# Altium PCB PCB_BaseBoard.PcbDoc
Units mil, origin at the board's own origin, x right, y up, seen from the top; angles counter-clockwise.
Board outline 2677.17 x 3346.46 mil, 3 copper layers (Top Layer, Mid-Layer 2, Bottom Layer); 48 components, 108 nets, 218 pads, 22 vias.
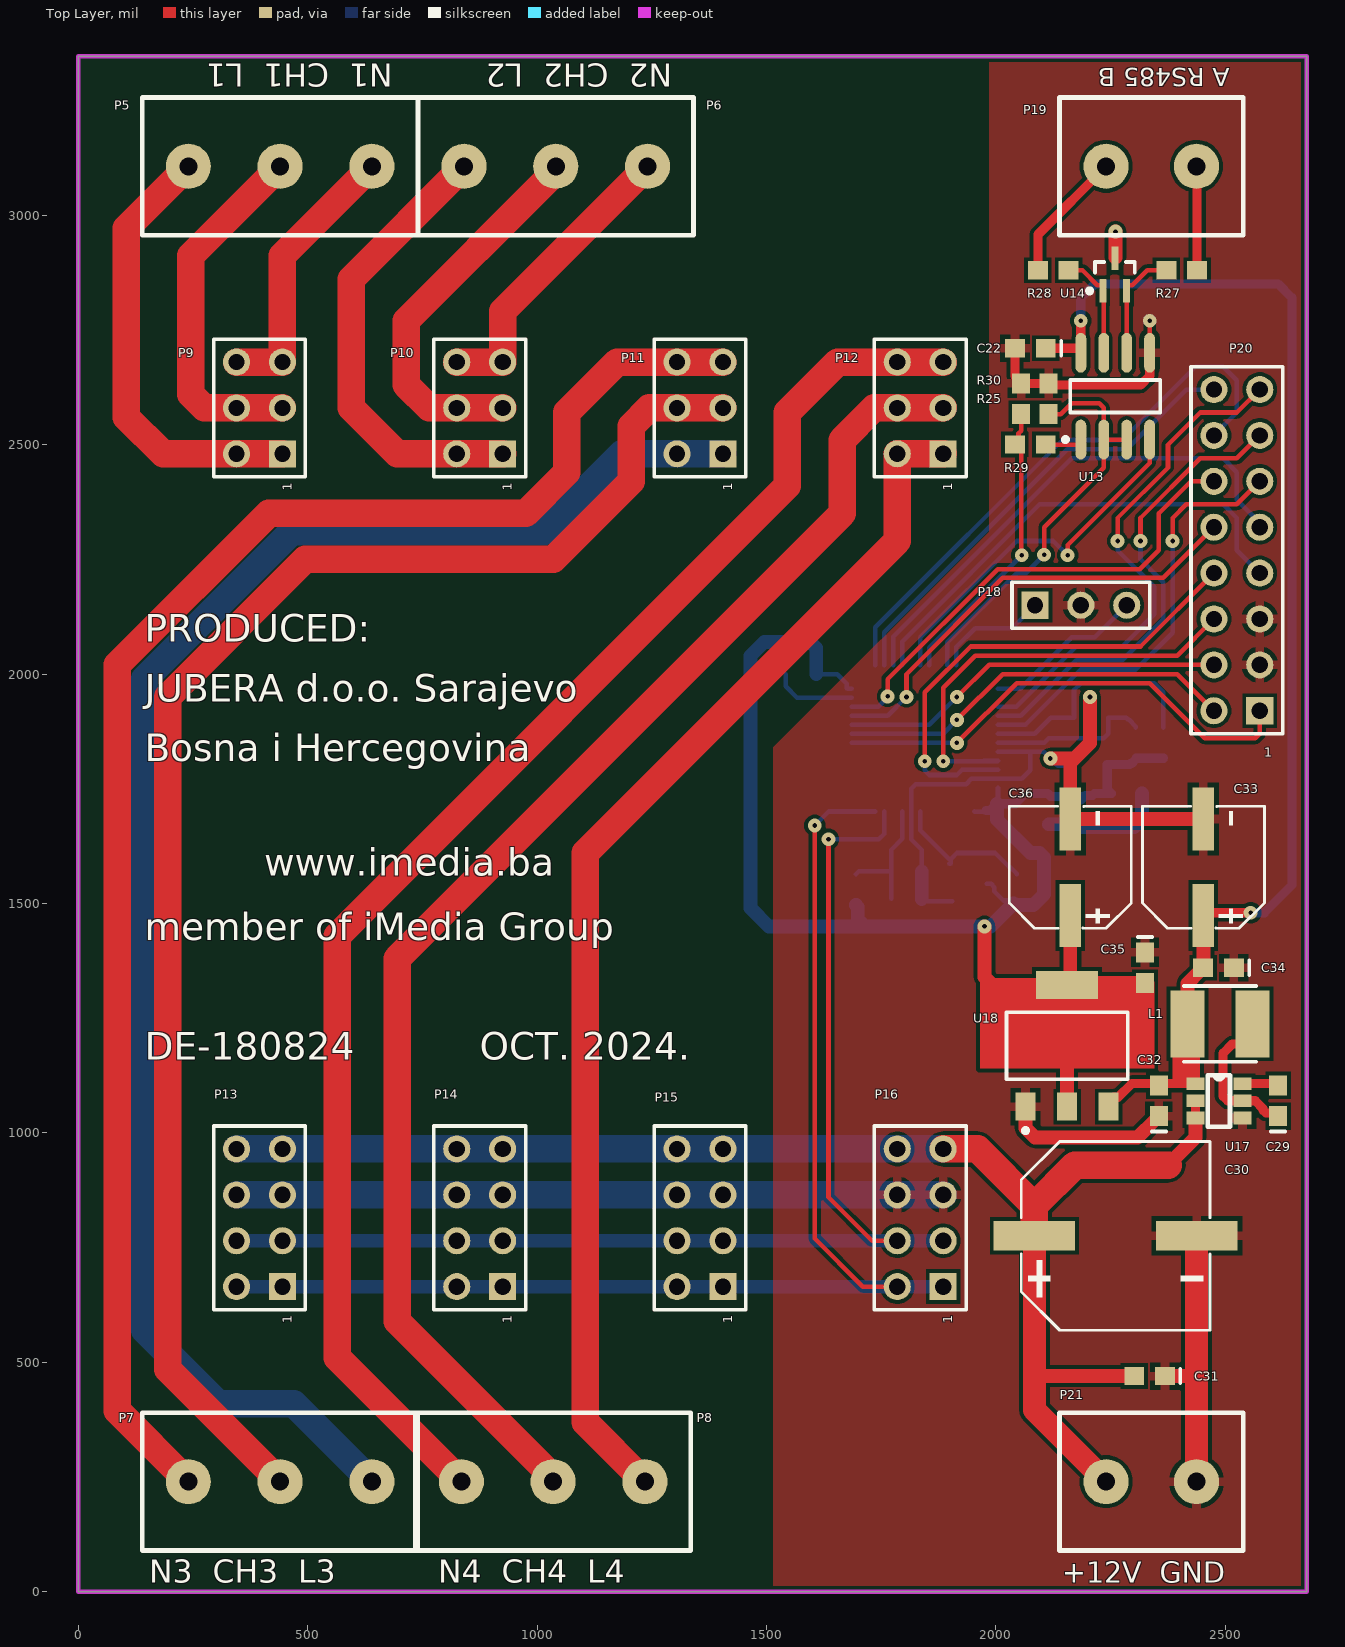
[diagram p0: Top Layer view]
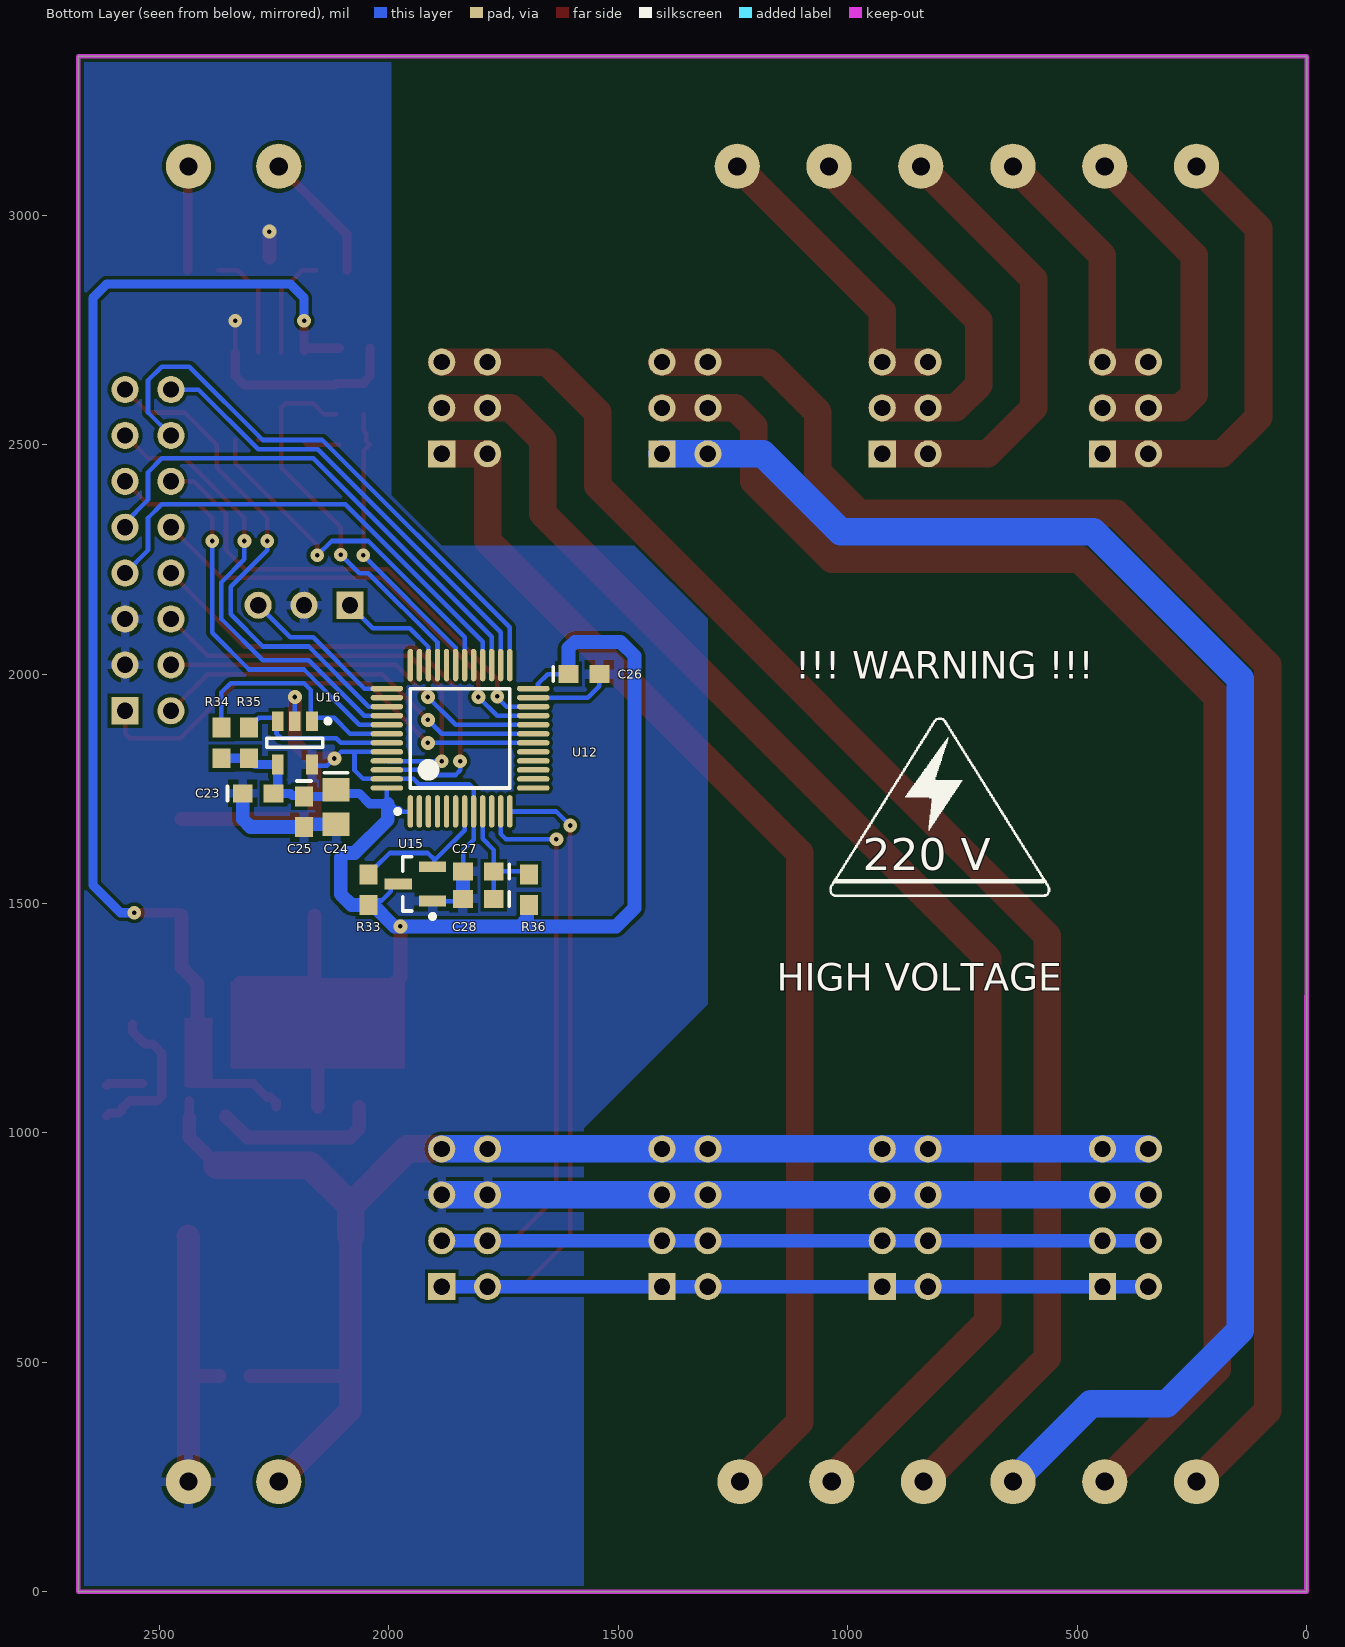
[diagram p1: Bottom Layer view, seen from below]
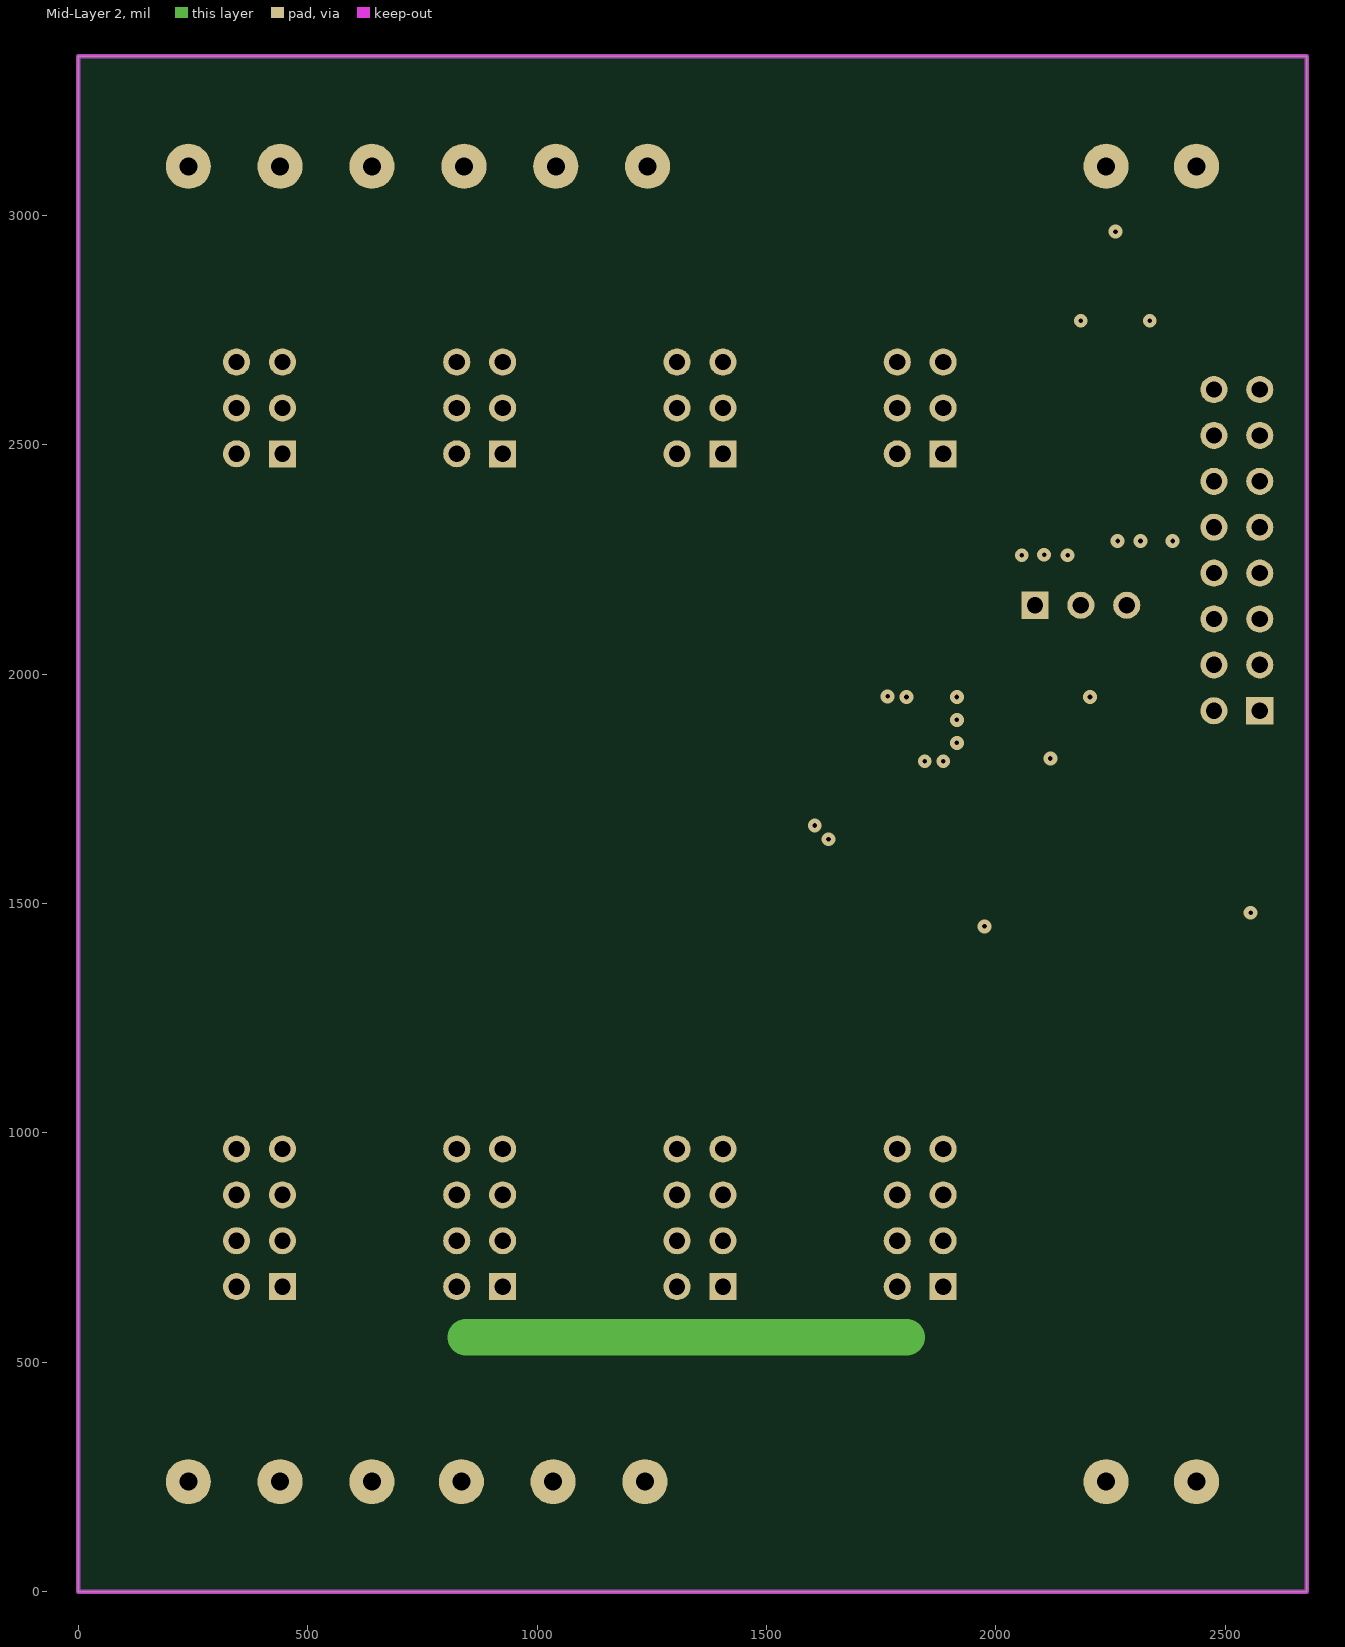
[diagram p2: Mid-Layer 2]

## Layer stack, top to bottom
Top Solder: solder mask 0.4, Solder Resist, Dk 3.5
Top Layer: signal copper 1.4
Dielectric 1: dielectric 12.6, FR-4, Dk 4.8
Mid-Layer 2: signal copper 1.4
Dielectric2: dielectric 12.6, FR-4, Dk 4.8
Bottom Layer: signal copper 1.4
Bottom Solder: solder mask 0.4, Solder Resist, Dk 3.5

## Board outline
0,0 0,3346.46 2677.17,3346.46 2677.17,0

## Design rules (kind name [scope] priority, off if disabled: settings)
BoardOutlineClearance [All] p1: gap=11.81 ignorepadtopadclearanceinfootprint=FALSE except(15.75: Arc-SplitBarrior Arc-SplitContinuation Track-SplitBarrior Track-SplitContinuation SMDPad-SplitBarrior SMDPad-SplitContinuation THPad-SplitBarrior THPad-SplitContinuation Via-SplitBarrior Via-SplitContinuation Fill-SplitBarrior Fill-SplitContinuation Poly-SplitBarrior Poly-SplitContinuation Region-SplitBarrior Region-SplitContinuation Text-SplitBarrior Text-SplitContinuation)
Clearance "Clearance Different Nets" [All] p1: gap=7.87 ignorepadtopadclearanceinfootprint=FALSE except(3.5: Arc-Arc Arc-Track Arc-SMDPad Track-Track Track-SMDPad; 5: SMDPad-SMDPad SMDPad-Via THPad-Via Via-Via; 10: Arc-Via Arc-Text Track-Via Track-Text SMDPad-Text THPad-Text Via-Text Fill-Text Poly-Text Region-Text Text-Text; 19.68: THPad-THPad Via-Hole)
Clearance "Clearance Same Nets" [All] p2: gap=7.87 ignorepadtopadclearanceinfootprint=FALSE except(3.5: Arc-Arc Arc-Track Arc-SMDPad Track-Track Track-SMDPad SMDPad-SMDPad; 5: SMDPad-Via THPad-Via; 10: Arc-Via Arc-Text Track-Via Track-Text SMDPad-Text THPad-Text Via-Via Via-Text Fill-Text Poly-Text Region-Text Text-Text)
Clearance "Clearance Bottom Layer" [OnLayer('Bottom Layer')] p3: gap=8 ignorepadtopadclearanceinfootprint=TRUE except(10: Arc-Text Track-Text SMDPad-Text THPad-Text Via-Text Fill-Text Poly-Text Region-Text Text-Text)
Clearance "Clearance Top Layer" [OnLayer('Top Layer')] p4: gap=8 ignorepadtopadclearanceinfootprint=TRUE except(10: Arc-Text Track-Text SMDPad-Text THPad-Text Via-Text Fill-Text Poly-Text Region-Text Text-Text)
HoleSize [All] p1: absolutevalues=TRUE maxlimit=248.03 minlimit=7.87 maxpercent=80.000 minpercent=20.000
MinimumAnnularRing [All] p1: minimumring=5.12
MinimumSolderMaskSliver [All] p1: minsoldermaskwidth=3.94
PolygonConnect PolygonConnect_1 [All] p1: thpad.connectstyle=Relief thpad.reliefconductorwidth=20 thpad.reliefentries=4 thpad.polygonreliefangle="90 Angle" thpad.airgapwidth=10 smdpad.connectstyle=Relief smdpad.reliefconductorwidth=20 smdpad.reliefentries=4 smdpad.polygonreliefangle="90 Angle" smdpad.airgapwidth=10 via.connectstyle=Direct via.reliefconductorwidth=20 via.reliefentries=4 via.polygonreliefangle="90 Angle" via.airgapwidth=10
RoutingCorners [All] p1: cornerstyle=Round minsetback=100 maxsetback=100
RoutingVias [All] p1: holewidth=19.68 width=39.37 viastyle="Through Hole" minholewidth=7.87 minwidth=13.78 maxholewidth=39.37 maxwidth=78.74
SilkToSilkClearance [All] p1: silktosilkclearance=3.94
SilkToSolderMaskClearance [IsPad] p1: minsilkscreentomaskgap=3.94 clearancetoexposedcopper=TRUE
SolderMaskExpansion [All] p1: expansion=4 istentingtop=FALSE
SupplyNets "Schematic Supply Nets_10" [InNet('GND1')] p1: voltage=0.000
SupplyNets "Schematic Supply Nets_9" [InNet('3V3')] p2: voltage=0.000
SupplyNets "Schematic Supply Nets_8" [InNet('L1')] p3: voltage=0.000
SupplyNets "Schematic Supply Nets_7" [InNet('+12_1')] p4: voltage=0.000
SupplyNets "Schematic Supply Nets_6" [InNet('GND')] p5: voltage=0.000
SupplyNets "Schematic Supply Nets_5" [InNet('L1IN')] p6: voltage=0.000
SupplyNets "Schematic Supply Nets_4" [InNet('GND2')] p7: voltage=0.000
SupplyNets "Schematic Supply Nets_3" [InNet('5V')] p8: voltage=0.000
SupplyNets "Schematic Supply Nets_2" [InNet('+3V3_1')] p9: voltage=0.000
SupplyNets "Schematic Supply Nets_1" [InNet('+12V')] p10: voltage=0.000
SupplyNets "Schematic Supply Nets" [InNet('12V')] p11: voltage=0.000
Width [All] p1: maxlimit=100 minlimit=3.5 preferedwidth=15
25 further rules are at their usual default settings.

## Components (designator, comment, footprint, x,y, rotation, side; value= is the part's Value field where it differs from the comment)
C22 "100nF" 0603 2075,2710 r180 top
C23 "" 0603 2285,1740 r180 bottom value=100nF
C24 "4u7" 0805 2115,1710 r270 bottom
C25 "100nF" 0603 2185,1700 r270 bottom
C26 "100nF" 0603 1575,2000 r180 bottom
C27 "1uF" 0603 1805,1570 r0 bottom
C28 "10nF" 0603 1805,1510 r0 bottom
C29 "" 0603 2615,1070 r90 top value=100nF
C30 "470uF" "ROQANG VT1V471M1010" 2275,770 r0 top value=10uF
C31 "" 0603 2335,470 r180 top value=100nF
C32 "" 0603 2355,1070 r90 top value=100nF
C33 "470uF" "SMD,D6.3xL7.7mm Aluminum Electrolytic Capacitors" 2455,1590 r90 top
C34 "" 0603 2485,1360 r180 top value=100nF
C35 "" 0603 2325,1360 r270 top value=100nF
C36 "" "SMD,D6.3xL7.7mm Aluminum Electrolytic Capacitors" 2165,1590 r90 top value=220uF
L1 "" XRNR4030-4.7uH/M 2485,1240 r0 top value=4,7uH
P5 "DIMMER1" "TERMINAL BLOK 3" 440,3106.5 r90 top locked
P6 "DIMMER2" "TERMINAL BLOK 3" 1040.86,3106.5 r90 top locked
P7 "DIMMER3" "TERMINAL BLOK 3" 440,240 r270 top locked
P8 "DIMMER4" "TERMINAL BLOK 3" 1035,240 r270 top locked
P9 "Header 3X2" HDR2X3 445,2480 r90 top locked
P10 "Header 3X2" HDR2X3 925,2480 r90 top locked
P11 "Header 3X2" HDR2X3 1405,2480 r90 top locked
P12 "Header 3X2" HDR2X3 1885,2480 r90 top locked
P13 "Header 4X2" HDR2X4 445,665 r90 top locked
P14 "Header 4X2" HDR2X4 925,665 r90 top locked
P15 "Header 4X2" HDR2X4 1405,665 r90 top locked
P16 "Header 4X2" HDR2X4 1885,665 r90 top locked
P18 "ULINK ICSP" HDR1X3 2085,2150 r0 top
P19 "RS485" "TERMINAL BLOK 2" 2338.5,3106.5 r270 top
P20 "Header 8X2" HDR2X8 2575,1920 r90 top
P21 "POWER" "TERMINAL BLOK 2" 2338.5,240 r90 top locked
R25 "10K" ERA-0603 2115,2600 r270 top
R27 "10R" ERA-0603 2405,2880 r180 top
R28 "10R" ERA-0603 2125,2880 r0 top
R29 "1K2" ERA-0603 2075,2500 r0 top
R30 "2K2" ERA-0603 2055,2600 r90 top
R33 "10K" ERA-0603 2045,1530 r270 bottom
R34 "2K2" ERA-0603 2365,1850 r270 bottom
R35 "2K2" ERA-0603 2305,1850 r270 bottom
R36 "10R" ERA-0603 1695,1530 r270 bottom
U12 "STM32F030C8T6" STM-LQFP48_N 1845,1860 r90 bottom
U13 "SN75176BD" D008_N 2260,2605.51 r90 top
U14 "ESDS552" DCK3_N 2259.18,2870.53 r90 top
U15 "TLV803MDBZR" DBZ3_N 1942.4,1542.6 r0 bottom
U16 "24AA01T-I/OT" SOT-23-OT5_N 2205,1850 r270 bottom
U17 "AP63205" TSOT-26 2435,1107.4 r0 top
U18 "REG1117-3.3" ZZ311 2155,1190 r0 top

## Footprints (in the part's own frame and the unit in brackets; to place one, negate y for a bottom-side part, rotate by r counter-clockwise, add the part's x,y. Pads: shape width x height; smd on the part's side, far side on the other; paste and mask are expansions set on the pad)
0603 [mm] "Chip Capacitor; Body 1.6 x 0.8 mm (LxW typ)"
  rect 1.1x1 smd: 1(-0.85,0) 2(0.85,0)
  silkscreen extent -1.7,-0.4 -1.7,0.4
0805 [mm] "Chip Capacitor; Body 2.0 x 1.2 mm (LxW typ)"
  rect 1.3x1.5 smd: 1(-0.95,0) 2(0.95,0)
  silkscreen extent -1.9,-0.65 -1.9,0.65
D008_N [mm] "SOIC, 8-Leads, Body 4.9x3.9mm, Pitch 1.27mm, IPC Medium Density"
  oval 2.2x0.6 smd: 1(-2.4,1.905) 2(-2.4,0.635) 3(-2.4,-0.635) 4(-2.4,-1.905) 5(2.4,-1.905) 6(2.4,-0.635) 7(2.4,0.635) 8(2.4,1.905)
  silkscreen extent -2.52,-2.5 0.9,2.88, body extent -1.95,-2.45 1.95,2.45, height 1.75
DBZ3_N [mm] "SOT23, 3-Leads, Body 2.9x1.3mm, Pitch 0.95mm, Lead Span 2.4mm, IPC Medium Density"
  rect 1.5x0.6 smd: 1(-0.95,0.95) 2(-0.95,-0.95) 3(0.95,0)
  silkscreen extent -1.07,-1.5 0.7,1.92, body extent -0.7,-1.52 0.7,1.52, height 1.12
DCK3_N [mm] "SOT23, 3-Leads, Body 2.0x1.25mm, Pitch 0.65mm, Lead Span 2.1mm, IPC Medium Density"
  rect 1.3x0.4 smd: 1(-0.9,0.65) 2(-0.9,-0.65) 3(0.9,0)
  silkscreen extent -1.02,-1.1 0.7,1.52, body extent -0.7,-1.07 0.7,1.08, height 1.1
ERA-0603 [mm] "Chip Resistor; Body 1.6 x 0.8 mm (LxW typ)"
  rect 1.1x1 smd: 1(-0.85,0) 2(0.85,0)
HDR1X3 [mm] "Connector; Header; 3 Position"
  rect 1.5x1.5 hole 0.9: 1(0,0)
  round 1.5 hole 0.9: 2(2.54,0) 3(5.08,0)
  silkscreen extent -1.27,-1.27 6.35,1.27
HDR2X3 [mm] "Connector; Header; 3x2 Position"
  rect 1.5x1.5 hole 0.9: 1(0,0)
  round 1.5 hole 0.9: 2(0,2.54) 3(2.54,0) 4(2.54,2.54) 5(5.08,0) 6(5.08,2.54)
  silkscreen extent -1.27,-1.27 6.35,3.81
HDR2X4 [mm] "Connector; Header; 4x2 Position"
  rect 1.5x1.5 hole 0.9: 1(0,0)
  round 1.5 hole 0.9: 2(0,2.54) 3(2.54,0) 4(2.54,2.54) 5(5.08,0) 6(5.08,2.54) 7(7.62,0) 8(7.62,2.54)
  silkscreen extent -1.27,-1.27 8.89,3.81
HDR2X8 [mm] "Connector; Header; 8x2 Position"
  rect 1.5x1.5 hole 0.9: 1(0,0)
  round 1.5 hole 0.9: 2(0,2.54) 3(2.54,0) 4(2.54,2.54) 5(5.08,0) 6(5.08,2.54) 7(7.62,0) 8(7.62,2.54) 9(10.16,0) 10(10.16,2.54) 11(12.7,0) 12(12.7,2.54) 13(15.24,0) 14(15.24,2.54) 15(17.78,0) 16(17.78,2.54)
  silkscreen extent -1.27,-1.27 19.05,3.81
"ROQANG VT1V471M1010" [mm] "470uF 35V 286mA@120Hz ±20% SMD,D10xL10.2mm Aluminum Electrolytic Capacitors - SMD ROHS"
  rect 4.5x1.65 smd: 1(-4.862,0.146) 2(4.138,0.146)
  silkscreen extent -5.59,-5.08 4.86,5.37, body extent -5,-5 5,5, height 10.2
"SMD,D6.3xL7.7mm Aluminum Electrolytic Capacitors" [mm]
  rect 3.5x1.2 smd paste+0 mask+0.051: 1(-2.949,0.074) 2(2.391,0.074)
  silkscreen extent -3.66,-3.3 3.1,3.45, body extent -3.4,-3.15 2.9,3.15, height 7.7
SOT-23-OT5_N [mm] "SOT23, 5-Leads, Body 2.9x1.6mm, Pitch 0.95mm, Lead Span 2.7mm, IPC Medium Density"
  rect 1.1x0.65 smd: 1(-1.2,0.95) 2(-1.2,0) 3(-1.2,-0.95) 4(1.2,-0.95) 5(1.2,0.95)
  silkscreen extent -1.32,-1.55 0.25,1.95, body extent -0.9,-1.55 0.9,1.55, height 1.45
STM-LQFP48_N [mm] "QFP, 48-Leads, Body 7x7mm, Pitch 0.5mm, IPC Medium Density"
  oval 1.8x0.3 smd: 1(-4.05,2.75) 2(-4.05,2.25) 3(-4.05,1.75) 4(-4.05,1.25) 5(-4.05,0.75) 6(-4.05,0.25) 7(-4.05,-0.25) 8(-4.05,-0.75) 9(-4.05,-1.25) 10(-4.05,-1.75) 11(-4.05,-2.25) 12(-4.05,-2.75) 25(4.05,-2.75) 26(4.05,-2.25) 27(4.05,-1.75) 28(4.05,-1.25) 29(4.05,-0.75) 30(4.05,-0.25) 31(4.05,0.25) 32(4.05,0.75) 33(4.05,1.25) 34(4.05,1.75) 35(4.05,2.25) 36(4.05,2.75)
  oval 0.3x1.8 smd: 13(-2.75,-4.05) 14(-2.25,-4.05) 15(-1.75,-4.05) 16(-1.25,-4.05) 17(-0.75,-4.05) 18(-0.25,-4.05) 19(0.25,-4.05) 20(0.75,-4.05) 21(1.25,-4.05) 22(1.75,-4.05) 23(2.25,-4.05) 24(2.75,-4.05) 37(2.75,4.05) 38(2.25,4.05) 39(1.75,4.05) 40(1.25,4.05) 41(0.75,4.05) 42(0.25,4.05) 43(-0.25,4.05) 44(-0.75,4.05) 45(-1.25,4.05) 46(-1.75,4.05) 47(-2.25,4.05) 48(-2.75,4.05)
  silkscreen extent -4.17,-2.75 2.75,3.58, body extent -3.5,-3.5 3.5,3.5, height 1.6
"TERMINAL BLOK 2" [mm] "Terminal blok 3,5mm"
  round 2.5 hole 1: 1(0,-2.5) 2(0,2.5)
  silkscreen extent -3.81,-5.08 3.81,5.08
"TERMINAL BLOK 3" [mm] "Terminal blok konektor 3 pina"
  round 2.5 hole 1: 1(0,5.08) 2(0,0) 3(0,-5.08)
  silkscreen extent -3.81,-7.62 3.81,7.62
TSOT-26 [mm]
  rect 1x0.7 smd: 1(0,0) 2(0,-0.95) 3(0,-1.9) 4(2.6,-1.9) 5(2.6,-0.95) 6(2.6,0)
  silkscreen extent 0.69,-2.38 1.91,0.48, body extent 0.53,-2.51 2.03,0.61, height 1
XRNR4030-4.7uH/M [mm] "2A 4.7uH Magnetic Adhesive Inductor ±20% 2.9A SMD-2P,4x4mm Power Inductors ROHS"
  rect 1.9x3.7 smd paste+0 mask+0.051: 1(-1.717,-0.059) 2(1.883,-0.059)
  silkscreen extent -1.92,-2.16 2.08,2.04
ZZ311 [mm] "SOT-223/SC-73; 4 Leads; Body 6.7 x 7.3 mm, inc. leads (LxW max)"
  rect 1.1x1.55 smd: 1(-2.3,-3.375) 2(0,-3.375) 3(2.3,-3.375)
  rect 3.45x1.55 smd: 4(0,3.375)
  silkscreen extent -3.35,-4.82 3.35,1.85

## Part data
C22 C23 C25 C26 C27 C28 C31 C35: library part C0603, "Ceramic Chip Capacitor - Standard", PackageDocument=Mar-2001, Code_IPC="1608 [0603]", Code_JEITA=0603, ComponentLink1Description="Manufacturer Link", ComponentLink1URL=http://www.kemet.com/, ComponentLink2Description=Datasheet, ComponentLink2URL=http://www.kemet.com/kemet/web/homepage/kechome.nsf/vapubfilesname/F3102TA.pdf/$file/F3102TA.pdf, DatasheetDocument=Mar-2001, LatestRevisionDate=19-Mar-2004, LatestRevisionNote="Silkscreen size reduced.", Note="Footprint corresponds to dimensions for bulk cassette packaging. This case size has tightened tolerances.", PackageReference=0603, Published=17-Jul-2002, Publisher="Altium Limited"
C24: library part C0805, "Ceramic Chip Capacitor - Standard", PackageDocument=Mar-2001, Code_IPC=2012[0805], Code_JEITA=0805, ComponentLink1Description="Manufacturer Link", ComponentLink1URL=http://www.kemet.com/, ComponentLink2Description=Datasheet, ComponentLink2URL=http://www.kemet.com/kemet/web/homepage/kechome.nsf/vapubfilesname/F3102TA.pdf/$file/F3102TA.pdf, DatasheetDocument=Mar-2001, LatestRevisionDate=19-Mar-2004, LatestRevisionNote="Silkscreen size reduced.", Note="Footprint corresponds to dimensions for bulk cassette packaging. This case size has tightened tolerances.", PackageReference=0805, Published=17-Jul-2002, Publisher="Altium Limited"
C29 C32 C34: library part C0603, "Ceramic Chip Capacitor - 25V", PackageDocument=Mar-2001, Code_IPC="1608 [0603]", Code_JEITA=0603, ComponentLink1Description="Manufacturer Link", ComponentLink1URL=http://www.kemet.com/, ComponentLink2Description=Datasheet, ComponentLink2URL=http://www.kemet.com/kemet/web/homepage/kechome.nsf/vapubfilesname/F3102TA.pdf/$file/F3102TA.pdf, DatasheetDocument=Mar-2001, LatestRevisionDate=19-Mar-2004, LatestRevisionNote="Silkscreen size reduced.", Note="Footprint corresponds to dimensions for bulk cassette packaging. This case size has tightened tolerances.", PackageReference=0603, Published=17-Jul-2002, Publisher="Altium Limited"
C30 C33 C36: library part "ROQANG VT1C221M0607", "220uF 16V 110mA@120Hz ±20% SMD,D6.3xL7.7mm Aluminum Electrolytic Capacitors - SMD ROHS", ComponentLink1Description="Manufacturer Link", ComponentLink1URL=http://www.vishay.com/, ComponentLink2Description=Datasheet, ComponentLink2URL=http://www.vishay.com/docs/25014/eka.pdf, DatasheetDocument=20-Feb-2001, DrillSize="Nominal, Rounded To The Nearest 0.1mm", Note="Refer to Manufacturer's Data Sheets for other lead formations", PackageReference=CAPPR2-5X11, Published=19-Mar-2004, Publisher="Altium Limited"
L1: library part Inductor, "2A 4.7uH Magnetic Adhesive Inductor ±20% 2.9A SMD-2P,4x4mm Power Inductors ROHS"
P5 P6 P7 P8: library part "TERMINAL BLOK 3", "3 pinski terminal blok konektor"
P9 P10 P11 P12: "Header, 3-Pin, Dual row", LatestRevisionDate=17-Jul-2002, LatestRevisionNote="Re-released for DXP Platform.", Publisher="Altium Limited"
P13 P14 P15 P16: "Header, 4-Pin, Dual row", LatestRevisionDate=17-Jul-2002, LatestRevisionNote="Re-released for DXP Platform.", Publisher="Altium Limited"
P18: library part "Header 3", "Header, 3-Pin", LatestRevisionDate=17-Jul-2002, LatestRevisionNote="Re-released for DXP Platform.", Publisher="Altium Limited"
P19 P21: library part "TERMINAL BLOK 2", "Terminal blok konektor 3,5 mm"
P20: "Header, 8-Pin, Dual row", LatestRevisionDate=17-Jul-2002, LatestRevisionNote="Re-released for DXP Platform.", Publisher="Altium Limited"
R25 R27 R28 R29 R30: library part ERAV, "Metal Film Thermosensitive Chip Resistor, 0.56 Ohm to 10k Ohm Range, 5% Tolerance, 0603 Size, 0.063 W", PackageDocument=Mar-2003, Code_IPC="1608 [0603]", ComponentLink1Description="Manufacturer Link", ComponentLink1URL=http://www.panasonic.com/industrial/components/resistive_products.htm, ComponentLink2Description=Datasheet, ComponentLink2URL=http://www.panasonic.com/industrial/components/pdf/AOF0000CE1.pdf, LatestRevisionDate=19-Mar-2004, LatestRevisionNote="Silkscreen size reduced.", Note="If flow soldering, adjust pad width of PCB Footprint to 0.7 - 0.8 times the width of the resistor.", PackageReference=ERA-0603, Published=17-Dec-2003, Publisher="Altium Limited"
R33 R34 R35: library part ERA3Y, "Rectangular Thick Film Chip Resistor, 10 Ohm to 330k Ohm Range, 0.1% and 0.5% Tolerance, 0603 Size, 0.063 W", PackageDocument=Mar-2003, Code_IPC="1608 [0603]", ComponentLink1Description="Manufacturer Link", ComponentLink1URL=http://www.panasonic.com/industrial/components/resistive_products.htm, ComponentLink2Description=Datasheet, ComponentLink2URL=http://www.panasonic.com/industrial/components/pdf/AOA0000CE8.pdf, LatestRevisionDate=19-Mar-2004, LatestRevisionNote="Silkscreen size reduced.", Note="If flow soldering, adjust pad width of PCB Footprint to 0.7 - 0.8 times the width of the resistor.", PackageReference=ERA-0603, Published=17-Dec-2003, Publisher="Altium Limited"
R36: library part ERA6Y, "Rectangular Thick Film Chip Resistor, 10 Ohm to 1M Ohm Range, 0.1% and 0.5% Tolerance, 0805 Size, 0.1 W", PackageDocument=Mar-2003, Code_IPC="2012 [0805]", ComponentLink1Description="Manufacturer Link", ComponentLink1URL=http://www.panasonic.com/industrial/components/resistive_products.htm, ComponentLink2Description=Datasheet, ComponentLink2URL=http://www.panasonic.com/industrial/components/pdf/AOA0000CE8.pdf, LatestRevisionDate=19-Mar-2004, LatestRevisionNote="Silkscreen size reduced.", Note="If flow soldering, adjust pad width of PCB Footprint to 0.7 - 0.8 times the width of the resistor.", PackageReference=ERA-0805, Published=17-Dec-2003, Publisher="Altium Limited"
U12: "ARM Cortex-M0 32-bit MCU, 64 KB Flash, 8 KB Internal RAM, 39 I/Os, 48-pin LQFP, -40 to 85 degC, Tray", I/Os (High Current)=39, Operating Frequency(F) (Processor speed) (MHz)=48, Supplier Part Number 1=497-14043-ND, Supply Voltage(Vcc) min (V)=2.4, ComponentLink1Description="Manufacturer URL", ComponentLink1URL=http://www.st.com/web/en/home.html, ComponentLink2Description=Datasheet, ComponentLink2URL=http://www.st.com/st-web-ui/static/active/en/resource/technical/document/datasheet/DM00088500.pdf, ComponentLink3Description="Package Specification", ComponentLink3URL=http://www.st.com/st-web-ui/static/active/en/resource/technical/document/datasheet/DM00058181.pdf, Core="ARM Cortex-M0", DatasheetVersion="Rev. 1", FLASH Size (Prog) (kB)=64, Internal RAM Size (kB)=8, Mounting Technology="Surface Mount", PackageDescription="48-Pin Low Profile Quad Flat Package, 7 x 7 mm Body, 0.5 mm Pitch", PackageReference=LQFP48, PackageVersion="Rev. 6, 06/2013", Packing=Tray, PartNumber=STM32F030C8T6, Supplier 1=Digi-Key, Supplier 2=Newark, Supplier 3=Mouser, Supplier Part Number 2=06X3647, Supplier Part Number 3=511-STM32F030C8T6
U13: "Differential Bus Transceiver", Code_IPC=SOIC127P600-8, ComponentLink1Description="Manufacturer Link", ComponentLink1URL=http://www.ti.com/, ComponentLink2Description=Datasheet, ComponentLink2URL=http://www-s.ti.com/sc/ds/sn75176b.pdf, DatasheetVersion=Sep-1989, LatestRevisionDate=13-Apr-2006, LatestRevisionNote="IPC-7351 Footprint Added.", Note="Receiver Hysteresis of 50mV Typical", PackageDescription="8-Pin Small Outline Integrated Circuit 1.27 mm Pitch", PackageReference=D008, PackageVersion=Jan-1998, Published=15-May-2002, Publisher="Altium Limited"
U14: library part TPD2E007DCKR, "ESD Protection Array for AC Signal Data Interface, 2 Channels, -40 to +85 degC, 3-pin SC70 (DCK), Green (RoHS & no Sb/Br)", Breakdown Voltage(Min)(V)=+/-14, IO Capacitance(Typ)(pF)=15, IO Leakage Current(nA)=50, Manufacturer="Texas Instruments", Supplier Part Number 1=296-25281-2-ND, ComponentLink1Description=Datasheet, ComponentLink1URL=http://www.ti.com/general/docs/lit/getliterature.tsp?genericPartNumber=TPD2E007&fileType=pdf, ComponentLink2Description="URL Link1", ComponentLink2URL=SamplesURL:http://www.ti.com/product/tpd2e007#samples, DatasheetVersion=SLVS796E, Eco-Plan="Green (RoHS & no Sb/Br)", IEC 61000-4-2 Air-Gap(+/- kV)=15, IEC 61000-4-2 Contact(+/- kV)=8, Mounting Technology="Surface Mount", PackageDescription="3-Pin Plastic Small-Outline Package, 0.65 mm Pitch, 2.1 mm Lead Span", PackageReference=DCK3, PackageVersion="revG, Jan-2007", PartNumber=TPD2E007DCKR, SubFamily="ESD Solution", Supplier 1=Digi-Key, Supplier 2=Digi-Key, Supplier 3=Digi-Key, Supplier 4=Farnell, Supplier 5=Newark, Supplier 6=Newark, Supplier 7=Mouser, Supplier Part Number 2=296-25281-1-ND, Supplier Part Number 3=296-25281-6-ND, Supplier Part Number 4=2120465, Supplier Part Number 5=94T5089, Supplier Part Number 6=55R7554, Supplier Part Number 7=595-TPD2E007DCKR
U15: "Voltage Supervisor with Active-Low, Open Drain Reset, 1 Supply Monitored, -40 to 125 degC, 3-pin SOT-23 (DBZ), Green (RoHS & no Sb/Br)", Manufacturer="Texas Instruments", Rating=Catalog, Supplier Part Number 1=296-29194-2-ND, Threshold Voltage 1 (typ)(Typ)(V)=4.38, # of supplies monitored=1, Code_JEDEC=TO-236-AB, ComponentLink1Description=Datasheet, ComponentLink1URL=http://www.ti.com/general/docs/lit/getliterature.tsp?genericPartNumber=TLV803M&fileType=pdf, DatasheetVersion=SBVS157B, Iq(Typ)(uA)=9, Mounting Technology="Surface Mount", Output Driver Type / Reset Output="Active-low, Open-drain", PackageDescription="3-Pin Plastic Small-Outline Package, 0.95 mm Pitch, 2.4 mm Lead Span", PackageReference=DBZ3, PackageVersion="revB, Apr-2005", PartNumber=TLV803MDBZR, Reset Threshold Accuracy(%)=2, SubFamily="Supervisor and Reset IC", Supplier 1=Digi-Key, Supplier 2=Digi-Key, Supplier 3=Digi-Key, Supplier 4=Newark, Supplier 5=Mouser, Supplier Part Number 2=296-29194-1-ND, Supplier Part Number 3=296-29194-6-ND, Supplier Part Number 4=58T0286, Supplier Part Number 5=595-TLV803MDBZR, Time Delay(ms)=200, VCC(Max)(V)=6, VCC(Min)(V)=1.1
U16: "1Kbit, 400kHz, 1.8V, I2C Serial EEPROM, 5-Pin SOT-23, Industrial Temperature, Tape and Reel", Supplier Part Number 1=24AA01T-I/OTTR-ND, Code_IPC=SOT23-5, ComponentLink1Description=Datasheet, ComponentLink1URL=http://ww1.microchip.com/downloads/en/DeviceDoc/21711J.pdf, ComponentLink2Description="Packaging Specification", ComponentLink2URL=http://www.microchip.com/stellent/groups/techpub_sg/documents/packagingspec/en012702.pdf, ComponentLink3Description="Microchip.com Home", ComponentLink3URL=http://www.microchip.com/, DatasheetVersion="revJ, Jan-2009", PackageDescription="5-Lead Plastic Small Outline Transistor (OT) [SOT-23]", PackageReference=SOT-23-OT5, PackageVersion="revBB, Aug-2009", Published=29-Jan-2009, Publisher="Altium Limited", Supplier 1=Digi-Key, Supplier 2=Digi-Key, Supplier 3=Digi-Key, Supplier 4=Farnell, Supplier Part Number 2=24AA01T-I/OTCT-ND, Supplier Part Number 3=24AA01T-I/OTDKR-ND, Supplier Part Number 4=1331269
U17: library part AP63200, "2A synchronous  buck converter"
U18: "800mA and 1A Low Dropout Positive Regulator 2.85V, 3.3V, 5V, and Adjustable", ComponentLink1Description="Manufacturer Link", ComponentLink1URL=http://www.ti.com/, ComponentLink2Description=Datasheet, ComponentLink2URL=http://www-s.ti.com/sc/ds/REG1117.pdf, DatasheetVersion=Sep-1997, LatestRevisionDate=17-Jul-2002, LatestRevisionNote="Re-released for DXP Platform.", PackageDescription="SOT-223/SC-73; 4 Leads; Body 6.7 x 7.3 mm, inc. leads (LxW max)", PackageReference=ZZ311, PackageVersion=revC, Published=8-Jun-2000, Publisher="Altium Limited"

## Via types
v1: diameter 30, hole 10, Top Layer to Bottom Layer, 22 vias

## Nets (pads, with @x,y where several pads share a name; then routed paths per layer and width w, separated by ;. In a path a pad name is that pad's centre, name@x,y a point inside that pad or via, vN(x,y) a via of type N, cw(c..) or ccw(c..) an arc to the next point about the centre after c; other vN are vias at no path point)
3V3: C23.2 C24.1 C25.1 C26.1 C35.2 C36.1 R33.2 R34.2 R35.2 R36.2 U12.1 U12.24 U12.48 U15.3 U16.4 U18.2 U18.4 | length 3210.4
  Top Layer w30: v1(1975,1450) 1975,1340 1992.13,1322.87 U18.4 U18.4@2158.66,1326.54 ; U18.2 2155,1170 ; C36.1 2162.1,1329.97 U18.4@2158.66,1326.54 ; C35.2 U18.4@2158.66,1326.54
  Bottom Layer w10: C26.1 1653.82,2000 1675.1,1978.72 1675.1,1969.1 1675.94,1968.27 U12.24 ; U12.1 1953.82,1700 1973.9,1700 ; 1973.9,1702.83 1978.9,1702.83 ; U15.3 1989.35,1542.6 1996.16,1535.79 1996.16,1526.24 2015.87,1506.54 R33.2@2035,1506.54 ; 2002.4,1717.4 2004.45,1719.45 U12.48
  Bottom Layer w20: 1978.9,1702.83 1987.83,1702.83 2002.4,1717.4 2042.4,1717.4 2065,1740 2112.4,1740 2118.94,1733.46 C25.1 ; C25.1@2185,1725.43 2194.69,1735.12 2210.12,1735.12 2215,1740 C23.2 2242.4,1749.13 U16.4 2291.22,1802.76 2293.35,1804.88 2295.31,1804.88 2305,1814.57 R35.2 R34.2
  Bottom Layer w30: C26.1 1608.46,2056.54 1595,2070 1495,2070 1465,2040 1465,1490 1505,1450 1715,1450 ; R36.2 1698.73,1492.8 1698.73,1466.27 1715,1450 ; 2002.4,1717.4 2002.4,1682.6 2075,1610 2095,1610 2105,1600 2105,1520 2081.54,1496.54 R33.2 ; R33.2@2038.35,1499.88 1988.46,1450 v1(1975,1450) 1715,1450
5V: C22.1 C32.2 C33.1 C34.2 L1.1 U13.8 U17.1 U18.3 | length 2651.5
  Top Layer w10: U13.8@2178.71,2710 2185,2703.71 U13.8
  Top Layer w20: C22.1 U13.8@2178.71,2710 ; U13.8@2185,2703.71 v1(2185,2770) ; U18.3 2245.55,1065.98 2257.2,1077.64 2266.06,1077.64 2295.83,1107.4 U17.1 ; C33.1 2458.2,1480 v1(2555,1480)
  Top Layer w30: L1.1 2417.4,1325.87 2444.88,1353.35 2444.88,1355.31 2449.57,1360 C34.2 2452.1,1360.56 C33.1
  Bottom Layer w20: v1(2185,2770) 2185,2820 2215,2850 2615,2850 2645,2820 2645,1540 2585,1480 v1(2555,1480)
12V: C30.1 C31.2 P13.7 P13.8 P14.7 P14.8 P15.7 P15.8 P16.7 P16.8 P21.2 U17.2 U17.3 | length 3166.9
  Top Layer w20: U17.3 U17.2
  Top Layer w30: 2083.58,470 C31.2 ; 2375,930 2435,990 U17.3
  Top Layer w50: C30.1 2083.58,470 2083.58,396.49 P21.2
  Top Layer w60: P16.7 1960,965 2083.58,841.42 ; C30.1 2083.58,841.42 ; 2375,930 2172.16,930 2083.58,841.42
  Bottom Layer w60: P13.8 P13.7 P14.8 P14.7 P15.8 P15.7 P16.8 P16.7
+3V3_1: 
+12_1: 
+12V: 
ADDRESS_0: P20.6 U12.45 | length 931.9
  Top Layer w10: v1(1885,1810) 1885,1970 1955,2040 2395,2040 P20.6
  Bottom Layer w10: v1(1885,1810) 1972.85,1810 1973.29,1810.44 2004.1,1810.44 U12.45
ADDRESS_1: P20.8 U12.46 | length 1075.9
  Top Layer w10: v1(1845,1810) 1845,1960 1945,2060 2315,2060 P20.8
  Bottom Layer w10: v1(1845,1810) 1845,1790 1855,1780 1915,1780 1926.1,1791.1 U12.46
ADDRESS_2: P20.10 U12.21 | length 988.9
  Top Layer w10: v1(1805,1950) 1805,2000 2015,2210 2365,2210 P20.10
  Bottom Layer w10: U12.21 1764.21,1909.21 v1(1805,1950)
ADDRESS_3: P20.12 U12.22 | length 1063.2
  Top Layer w10: v1(1763.79,1951.21) 1763.79,1988.79 2003.79,2228.79 2313.79,2228.79 2355,2270 2355,2350 2425,2420 P20.12
  Bottom Layer w10: U12.22 1743.9,1928.9 1763.79,1948.79 v1(1763.79,1951.21)
ADDRESS_4: P20.14 U12.25 | length 1259.1
  Bottom Layer w10: U12.25 1736.73,2101.73 2145,2510 2275,2510 2435,2670 2495,2670 2525,2640 2525,2570 P20.14
ADDRESS_5: P20.16 U12.26 | length 1009.5
  Bottom Layer w10: U12.26 1756.42,2091.42 2155,2490 2285,2490 2415,2620 P20.16
BUTTON_DOWN: P20.4 U12.20 | length 843.5
  Top Layer w10: v1(1915,1950) 1985,2020 P20.4
  Bottom Layer w10: U12.20 1854.53,1889.53 v1(1915,1950)
BUTTON_OK: P20.2 U12.19 | length 876.5
  Top Layer w10: v1(1915,1900) 2015,2000 2395,2000 P20.2
  Bottom Layer w10: U12.19 1884.84,1869.84 v1(1915,1900)
BUTTON_UP: P20.1 U12.18 | length 1047.2
  Top Layer w10: v1(1915,1850) 2045,1980 2335,1980 2455,1860 2565,1860 2575,1870 P20.1
  Bottom Layer w10: U12.18 1914.84,1850.16 v1(1915,1850)
CURRENT: 
DIM1: P5.2 P9.3 P9.4 | length 789.7
  Top Layer w60: P5.2 245,2911.5 245,2610 275,2580 P9.4 P9.3
DIM2: P6.2 P10.3 P10.4 | length 842.2
  Top Layer w60: P10.3 P10.4 765,2580 715,2630 715,2770 1021.65,3076.65 1021.65,3076.89 1040.86,3096.1 P6.2
DIM3: P7.2 P11.3 P11.4 | length 3352.7
  Top Layer w60: P7.2 195,485 195,1950 495,2250 1035,2250 1205,2420 1205,2540 1245,2580 P11.4 P11.3
DIM4: P8.2 P12.3 P12.4 | length 3061.6
  Top Layer w60: P8.2 1035,250 695,590 695,1380 1665,2350 1665,2510 1735,2580 P12.3
GATE: 
GND: C22.2 C23.1 C24.2 C25.2 C26.2 C27.2 C28.2 C30.2 C31.1 C32.1 C33.2 C34.1 C35.1 C36.2 P13.5 P13.6 P14.5 P14.6 P15.5 P15.6 P16.5 P16.6 P18.2 P20.3 P20.5 P21.1 R25.1 R30.2 U12.8 U12.23 U12.44 U12.47 U13.5 U14.3 U15.1 U16.2 U16.5 U17.4 U18.1 | length 4999.6
  Top Layer w10: U13.5 v1(2335,2770)
  Top Layer w20: C22.2 2041.54,2648.9 2055,2635.43 R30.2 R25.1 2118.46,2630 2315,2630 2335,2650 U13.5
  Top Layer w30: U18.1 2064.45,1010.55 2085,990 2308.46,990 2348.35,1029.88 2350.31,1029.88 2355,1034.57 C32.1 ; v1(2118.77,1816.06) 2161.06,1816.06 ; 2162.1,1816.06 2162.1,1807.1 ; v1(2205,1950) 2205,1850 2162.1,1807.1 ; U14.3@2260.56,2907.34 v1(2260.56,2964.3) ; C31.1 2436.93,470 ; C33.2 C36.2 2162.1,1807.1
  Top Layer w50: P21.1 2436.93,470 2436.93,774.78 C30.2
  Bottom Layer w10: C26.2 1541.54,1973.46 1566.42,1948.58 U12.23 ; C28.2 1843.27,1505.2 U15.1 ; C27.2 1838.46,1616.54 1815.47,1639.53 U12.8 1815.47,1750.47 1825,1760 1935,1760 1946.42,1771.42 U12.47 2056.42,1771.42 2075,1790 2075,1830 ; U12.44 2104.53,1830.47 2135,1800 2164.84,1800 U16.5 ; U16.2 v1(2205,1950)
  Bottom Layer w30: C28.2 C27.2 ; C24.2 2180.31,1672.6 2185,1667.91 C25.2 2301.54,1666.54 2318.46,1683.46 C23.1
  Bottom Layer w60: P13.6 P13.5 P14.6 P14.5 P15.6 P15.5 P16.6 P16.5
GND1: 
GND2: 
I2C1_SCL: R34.1 U12.42 U16.1 | length 526.6
  Bottom Layer w10: U12.42 2084.84,1869.84 2119.49,1904.49 2170.2,1904.49 2170.2,1965.2 2185,1980 2345,1980 2365,1960 R34.1
I2C1_SDA: R35.1 U12.43 U16.3 | length 353.3
  Bottom Layer w10: U12.43 2004.61,1850 2105,1850 2115,1860 2235,1860 2245,1870 2245,1904.49 2283.98,1904.49 2288.35,1900.12 2290.31,1900.12 2305,1885.43 R35.1
L1: 
L1IN: 
LED_CH1: P20.15 U12.39 | length 1122.6
  Top Layer w10: v1(2265,2290) 2265,2340 2375,2450 2375,2500 2445,2570 2525,2570 P20.15
  Bottom Layer w10: U12.39 2044.43,1928.9 2048.38,1932.85 2048.38,1933.38 2175,2060 2275,2060 2345,2130 2345,2190 2265,2270 v1(2265,2290)
LED_CH2: P20.13 U12.40 | length 1023.1
  Top Layer w10: v1(2315,2290) 2315,2340 2445,2470 2525,2470 P20.13
  Bottom Layer w10: U12.40 2054.21,1909.21 2175,2030 2275,2030 2365,2120 2365,2200 2315,2250 v1(2315,2290)
LED_CH3: P20.11 U12.41 | length 942.1
  Top Layer w10: v1(2385,2290) 2385,2340 2415,2370 2525,2370 P20.11
  Bottom Layer w10: U12.41 2064.53,1889.53 2185,2010 2305,2010 2385,2090 v1(2385,2290) v1@2381.17,2286.17
LED_CH4: P20.9 U12.27 | length 1124.8
  Bottom Layer w10: U12.27 1776.1,2081.1 2165,2470 2495,2470 2525,2440 2525,2380 2575,2330 P20.9
LED_LEARN: P20.7 U12.28 | length 1057.6
  Bottom Layer w10: U12.28 1795.79,2070.79 2095,2370 2495,2370 2525,2340 2525,2270 P20.7
LIVE1: P5.1 P9.1 P9.2 | length 975.6
  Top Layer w60: P5.1 105,2971.5 105,2560 185,2480 P9.2 P9.1
LIVE2: P6.1 P10.1 P10.2 | length 999.8
  Top Layer w60: P6.1 595,2860.64 595,2580 695,2480 P10.2 P10.1
LIVE3: P7.1 P11.1 P11.2 | length 3514.7
  Bottom Layer w60: P7.1 470,410 305,410 145,570 145,1990 465,2310 1015,2310 1185,2480 P11.2 P11.1
LIVE4: P8.1 P12.1 P12.2 | length 2675.5
  Top Layer w60: P8.1 1105,370 1105,1610 1785,2290 P12.2 P12.1
N1: 
NetC1_1: 
NetC1_2: 
NetC10_2: 
NetC12_1: 
NetC12_2: 
NetC13_2: 
NetC18_2: 
NetC20_1: 
NetC21_1: 
NetC27_1: C27.1 C28.1 R36.1 U12.9 | length 279.8
  Bottom Layer w10: R36.1 1701.54,1570 C27.1 ; C28.1 C27.1 ; U12.9 1795.79,1640.79 1771.54,1616.54 C27.1
NetC29_1: C29.1 L1.2 U17.5 | length 333.8
  Top Layer w20: L1.2 2559.13,1221.06 2531.73,1193.66 2515.11,1193.66 2495,1173.54 2495,1080 2505,1070 U17.5 2565,1070 2581.81,1053.19 2581.81,1050 2588.7,1043.12 2608.42,1043.12 C29.1
NetC29_2: C29.2 U17.6 | length 79.3
  Top Layer w20: U17.6 2611.06,1107.4 C29.2
NetD1_2: 
NetD2_2: 
NetD3_2: 
NetD7_2: 
NetD8_1: 
NetD9_1: 
NetD10_1: 
NetD11_1: 
NetD12_1: 
NetP17_6: 
NetP17_7: 
NetP17_8: 
NetP17_9: 
NetP17_10: 
NetP17_11: 
NetP17_12: 
NetP17_13: 
NetP17_14: 
NetP17_15: 
NetP17_16: 
NetP19_1: P19.1 R28.1 | length 288
  Top Layer w20: R28.1 2091.54,2957.96 P19.1
NetP19_2: P19.2 R27.1 | length 227.1
  Top Layer w20: P19.2 2438.46,3104.96 R27.1
NetQ1_1: 
NetR2_1: 
NetR3_1: 
NetR4_1: 
NetR7_2: 
NetR8_2: 
NetR10_2: 
NetR11_2: 
NetR15_2: 
NetR19_1: 
NetR22_2: 
NetR27_2: R27.2 U13.6 U14.2 | length 246.1
  Top Layer w10: U13.6 2285,2834.86 U14.2 2284.77,2844.64 2287.65,2847.51 2297.19,2847.51 2329.68,2880 R27.2
NetR28_2: R28.2 U13.7 U14.1 | length 235
  Top Layer w10: R28.2 2188.68,2880 2221.17,2847.51 2230.72,2847.51 2233.59,2844.64 U14.1 2235,2833.68 U13.7
NetR29_2: R29.2 U13.1 | length 83.9
  Top Layer w10: R29.2 2178.71,2500 2185,2506.29 U13.1
NetR33_1: R33.1 U12.7 U15.2 | length 312.7
  Bottom Layer w10: U12.7 1835.16,1659.84 1898.64,1596.36 ; U15.2@1898.64,1586.36 1900.9,1586.36 1901.36,1586.81 1901.36,1596.36 1915,1610 1998.46,1610 2028.35,1580.12 2030.31,1580.12 2045,1565.43 R33.1
NetU1_1: 
NEUTRAL1: P5.3 P9.5 P9.6 | length 607.3
  Top Layer w60: P9.6 P9.5 445,2911.5 P5.3
NEUTRAL2: P6.3 P10.5 P10.6 | length 657.3
  Top Layer w60: P10.6 P10.5 925,2790.64 P6.3
NEUTRAL3: P7.3 P11.5 P11.6 | length 3513.7
  Top Layer w60: P7.3 85,395 85,2020 415,2350 975,2350 1065,2440 1065,2570 1175,2680 P11.6 P11.5
NEUTRAL4: P8.3 P12.5 P12.6 | length 3233.3
  Top Layer w60: P8.3 565,510 565,1430 1545,2410 1545,2570 1655,2680 P12.6 P12.5
NTC: 
OUT1: 
RX: P13.3 P13.4 P14.3 P14.4 P15.3 P15.4 P16.3 P16.4 U12.11 | length 2684.6
  Top Layer w10: v1(1635,1640) 1635,860 1730,765 P16.4
  Bottom Layer w10: v1(1635,1640) 1745,1640 1756.42,1651.42 U12.11
  Bottom Layer w30: P13.4 P13.3 P14.4 P14.3 P15.4 P15.3 P16.4 P16.3
RX2: 
SWCLK: P18.3 U12.37 | length 355.8
  Bottom Layer w10: U12.37 2053.27,1968.27 2165,2080 2215,2080 P18.3
SWCLK1: 
SWDIO: P18.1 U12.34 | length 248.3
  Bottom Layer w10: U12.34 1913.9,2058.9 1955,2100 2035,2100 P18.1
SWDIO1: 
TX: P13.1 P13.2 P14.1 P14.2 P15.1 P15.2 P16.1 P16.2 U12.12 | length 2807.9
  Top Layer w10: v1(1605,1670) 1605,770 1710,665 P16.2
  Bottom Layer w10: v1(1605,1670) 1635.55,1700.55 U12.12
  Bottom Layer w30: P13.2 P13.1 P14.2 P14.1 P15.2 P15.1 P16.2 P16.1
TX2: 
USART1_DE: R25.2 U12.33 U13.2 U13.3 | length 897.3
  Top Layer w10: v1(2105,2260) 2105,2320 2235,2450 U13.2 ; R25.2 2141.54,2566.54 2165,2590 2225,2590 2235,2580 U13.2 ; U13.3 U13.2
  Bottom Layer w10: U12.33 1894.21,2069.21 2045,2220 2065,2220 v1(2105,2260)
USART1_RX: R29.1 R30.1 U12.31 | length 642.2
  Top Layer w10: R30.1 2055,2530 2049.23,2524.23 2049.23,2507.7 R29.1 2055,2486.54 2055,2260 v1(2056.21,2258.79)
  Bottom Layer w10: U12.31 1854.84,2057.42 v1(2056.21,2258.79)
USART1_TX: U12.30 U13.4 | length 807.9
  Top Layer w10: v1(2156.21,2258.79) 2156.21,2281.21 2335,2460 U13.4
  Bottom Layer w10: U12.30 1835.16,2080.16 2045,2290 2125,2290 v1(2156.21,2258.79)
USART_RX: 
USART_TX: 
ZEROCROSS: 
pads on no net: U12.2 U12.3 U12.4 U12.5 U12.6 U12.10 U12.13 U12.14 U12.15 U12.16 U12.17 U12.29 U12.32 U12.35 U12.36 U12.38
copper on no net: | length 960
  Mid-Layer 2 w80: 845,555 1805,555

## Polygon pours and split planes (outlines as drawn)
GND on Top Layer "GND_L01_P001" (solid, pour order 1): 2675,3350 1985,3350 1985,2310 1515,1840 1515,0 2665,0 2675,10
GND on Bottom Layer "GND_L03_P002" (solid, pour order 2): 2675,3350 2675,0 1575,0 1575,1010 1305,1280 1305,2120 1465,2280 1885,2280 1995,2390 1995,3350

## Keep-outs
Keep-Out Layer:
  lines w10: 0.35,0 0.35,1299.21 ; 0,0 2677.17,0 2677.17,3346.46 0,3346.46 0,0

## Other copper
Top Layer:
  rectangle net 3V3: 1965,1140 2345,1330
  rectangle net 5V: 2385,1100 2445,1250

## Silkscreen, mask and mechanical layers (free items; w line width, h text height)
Top Overlay:
  text "N1  CH1  L1" at 685,3330 h50 r180
  text "N2  CH2  L2" at 1295,3330 h50 r180
  text "A RS485 B" at 2510,3320 h40 r180
  text "PRODUCED:" at 145,2070 h60
  text "JUBERA d.o.o. Sarajevo" at 145,1940 h60
  text "Bosna i Hercegovina" at 145,1810 h60
  text "www.imedia.ba" at 405,1560 h60
  text "member of iMedia Group" at 145.24,1420 h60
  text "DE-180824" at 145,1160 h60
  text "OCT. 2024." at 875,1160 h60
  text "N3  CH3  L3" at 155,20 h50
  text "N4  CH4  L4" at 785,20 h50
  text "+12V  GND" at 2145,20 h45
Bottom Overlay:
  drawing of 3 lines, arcs and shapes, not listed
  text "!!! WARNING !!!" at 1115,1990 h60
  text "220 V" at 967,1572.12 h70
  text "HIGH VOLTAGE" at 1155,1310 h60
Mechanical 1:
  lines w10: 22.56,570 22.56,2735.35 494.45,2735.35 494.45,570 22.56,570 ; 502.56,570 502.56,2735.35 974.45,2735.35 974.45,570 502.56,570 ; 982.56,570 982.56,2735.35 1454.45,2735.35 1454.45,570 982.56,570 ; 1462.56,570 1462.56,2735.35 1934.45,2735.35 1934.45,570 1462.56,570

## Text inside footprints (layer, text, board x,y; h text height)
P9: Top Overlay "1" at 465,2400 h20 r90
P10: Top Overlay "1" at 945,2400 h20 r90
P11: Top Overlay "1" at 1425,2400 h20 r90
P12: Top Overlay "1" at 1905,2400 h20 r90
P13: Top Overlay "1" at 465,585 h20 r90
P14: Top Overlay "1" at 945,585 h20 r90
P15: Top Overlay "1" at 1425,585 h20 r90
P16: Top Overlay "1" at 1905,585 h20 r90
P20: Top Overlay "1" at 2585,1820 h20